# Altium PCB PCB.PcbDoc
Units mil, origin at the board's own origin, x right, y up, seen from the top; angles counter-clockwise.
Board outline 2900 x 2550 mil, 2 copper layers (Top Layer, Bottom Layer); 32 components, 34 nets, 152 pads, 0 vias.
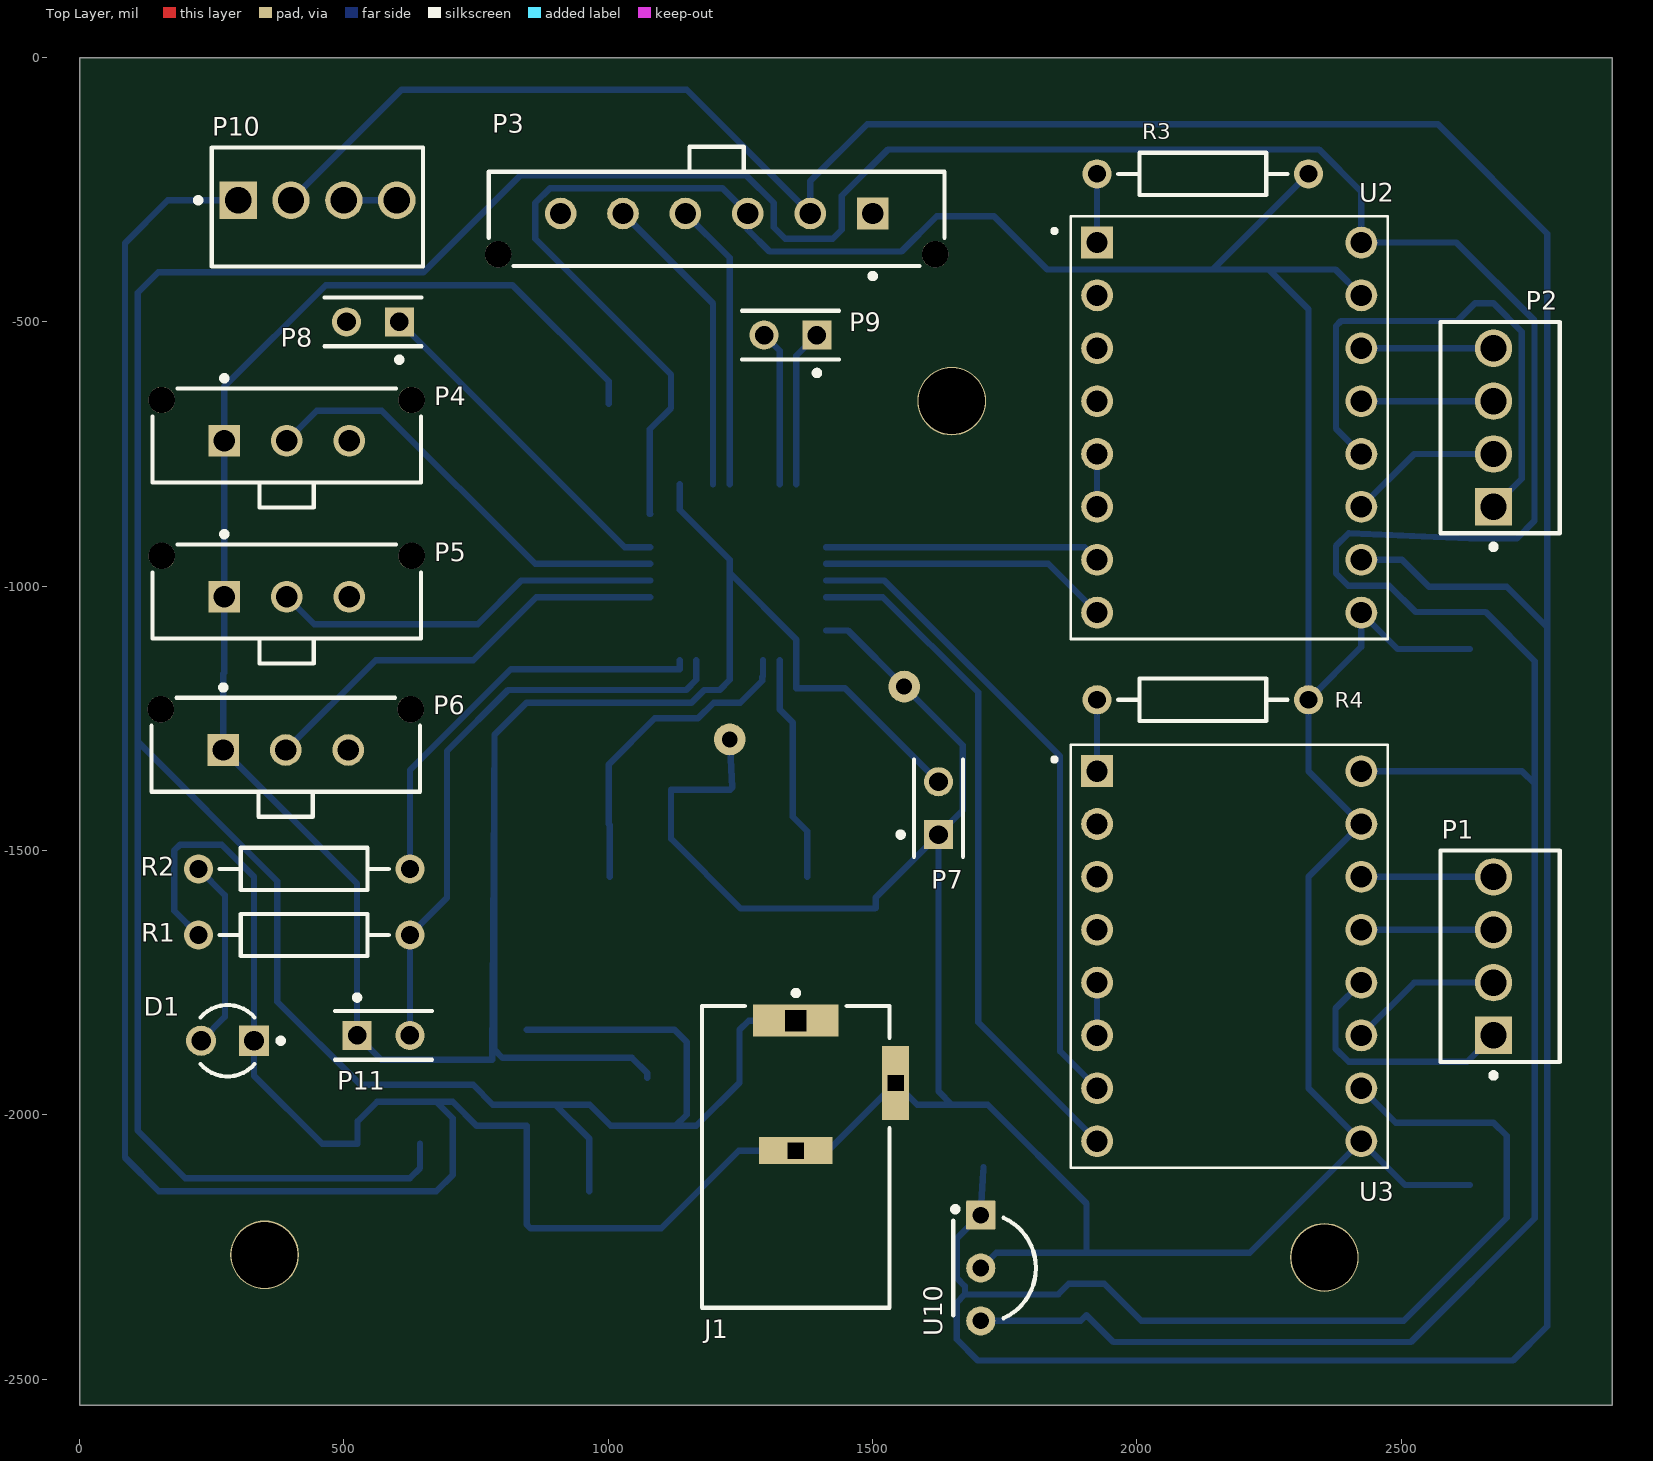
[diagram p0: Top Layer view]
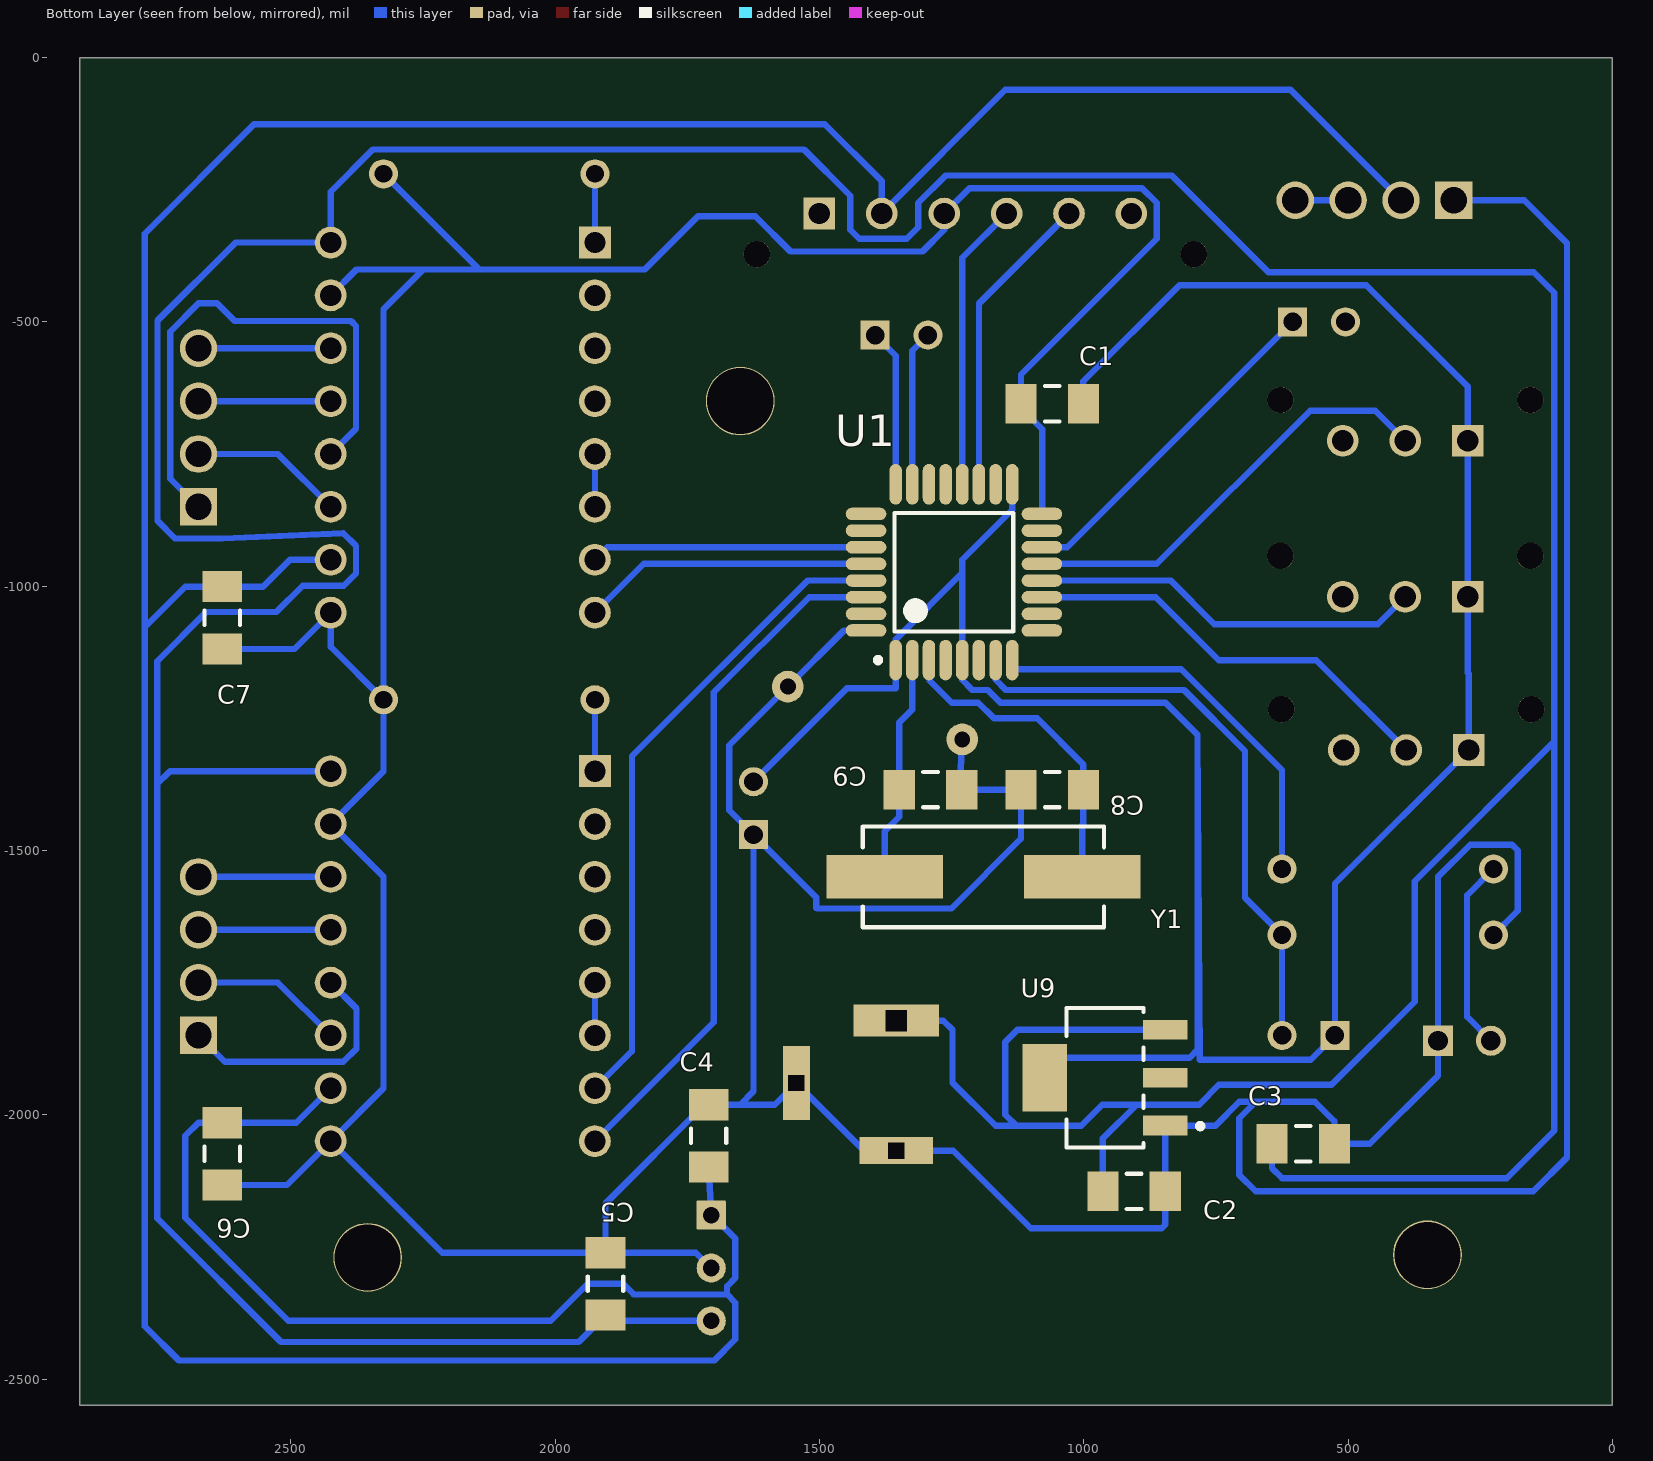
[diagram p1: Bottom Layer view, seen from below]
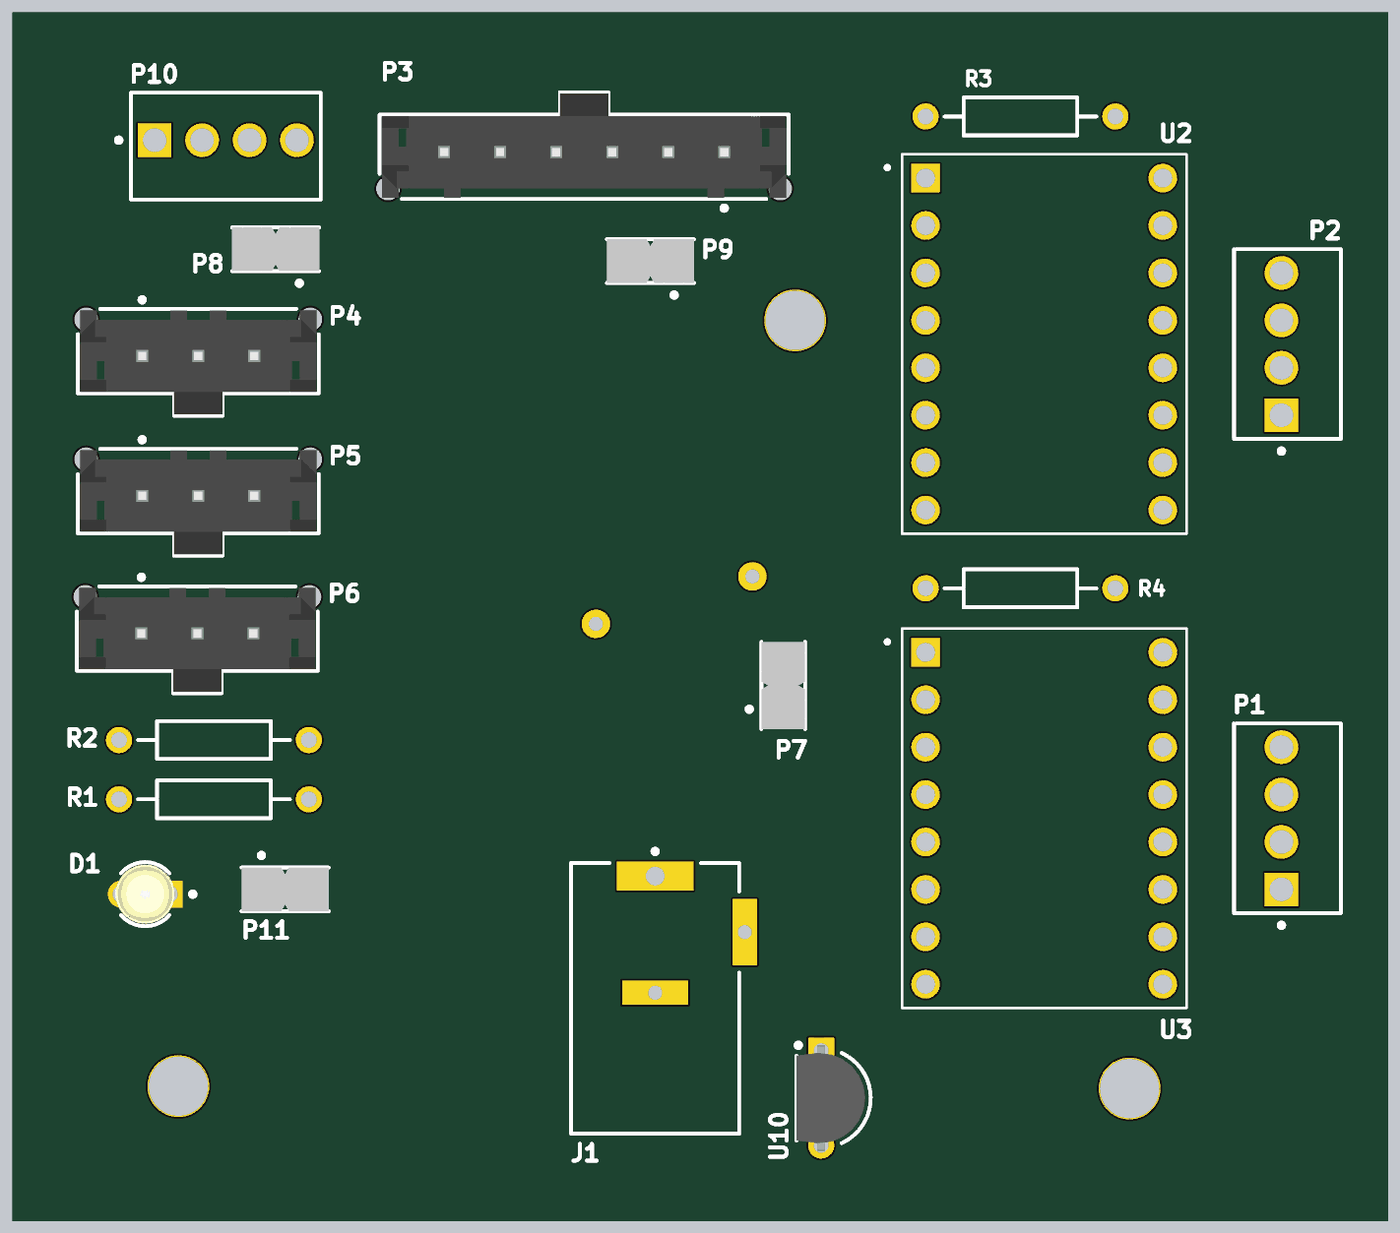
[diagram p2: 3D render of the assembled board from above, using the file's embedded part models]

## Layer stack, top to bottom
Top Solder: solder mask 0.4, Solder Resist, Dk 3.5
Top Layer: signal copper 1.4
Dielectric 1: dielectric 12.6, FR-4, Dk 4.8
Bottom Layer: signal copper 1.4
Bottom Solder: solder mask 0.4, Solder Resist, Dk 3.5

## Board outline
0,-2550 0,0 2900,0 2900,-2550

## Design rules (kind name [scope] priority, off if disabled: settings)
Clearance [All] p1: gap=12 ignorepadtopadclearanceinfootprint=FALSE
PolygonConnect [All] p1: connectstyle=Relief reliefconductorwidth=10 reliefentries=4 polygonreliefangle="90 Angle" airgapwidth=10
RoutingLayers [All] p1: top layer_v5=FALSE bottom layer_v5=TRUE
RoutingVias [All] p1: holewidth=28 width=50 viastyle="Through Hole" minholewidth=28 minwidth=50 maxholewidth=28 maxwidth=50
SolderMaskExpansion [All] p1: expansion=4 istentingtop=FALSE
Width [All] p1: maxlimit=12 minlimit=12 preferedwidth=12 minimp=50.000000 maximp=50.000000 favimp=50.000000
29 further rules are at their usual default settings.

## Components (designator, comment, footprint, x,y, rotation, side; value= is the part's Value field where it differs from the comment)
C1 "100nF" KEMT-1206-2_M 1060,-655 r180 bottom
C2 "100nF" KEMT-1206-2_M 905,-2145 r0 bottom
C3 "100nF" KEMT-1206-2_M 585,-2055 r0 bottom
C4 "100nF" KEMT-1206-2_M 1710,-2040 r90 bottom
C5 "330nF" KEMT-1206-2_M 1905,-2320 r270 bottom
C6 "100nF" KEMT-1206-2_M 2630,-2074.06 r270 bottom
C7 "100nF" KEMT-1206-2_M 2630,-1060 r270 bottom
C8 "10pF" KEMT-1206-2_M 1060,-1385 r0 bottom
C9 "10pF" KEMT-1206-2_M 1290,-1385 r180 bottom
D1 "HLMP-1719" FP-HLMP-1719-MFG 280,-1860 r180 top
J1 "RAPC712X" SWITCH-RAPC712X-3_V 1355,-1945 r0 top
P1 "NEMA17_X" TECO-640456-4 2675,-1700 r270 top
P2 "NEMA17_Y" TECO-640456-4 2675,-700 r270 top
P3 "HC_05" 66200611122 1205.27,-305.04 r0 top
P4 "SS_5GL" 66200311122 391.89,-714.96 r180 top
P5 "SS_5GL" 66200311122 391.89,-1009.96 r180 top
P6 "SS_5GL" 66200311122 390,-1300 r180 top
P7 "Powersupply programming" TECO-5-146280-2_V 1625,-1420 r90 top
P8 "Conecter to MG90S" TECO-5-146280-2_V 555,-500 r180 top
P9 "Programmer" TECO-5-146280-2_V 1345,-525 r180 top
P10 "MG90S" TECO-640456-4 450,-270 r180 top
P11 "Pushbutton" TECO-5-146280-2_V 575,-1850 r0 top
R1 "Res2" AXIAL-0.4 425,-1660 r180 top value=10K
R2 "Res2" AXIAL-0.4 425,-1535 r180 top value=330
R3 "Res2" AXIAL-0.4 2125,-220 r180 top value=330
R4 "Res2" AXIAL-0.4 2125,-1215 r180 top value=330
U1 "STM32F303K8T6" STM-LQFP32_M 1245.75,-973.66 r90 bottom
U2 "A4988_DRIVER_Y" MODULE_A4988_STEPPER_MOTOR_DRIVER_CARRIER 2175,-700 r0 top
U3 "A4988_DRIVER_X" MODULE_A4988_STEPPER_MOTOR_DRIVER_CARRIER 2175,-1700 r0 top
U9 "TLV1117-33IDCYR" FP-DCY0004A-MFG 960,-1930 r0 bottom
U10 "LM78L05ACZ" LP0003A 1705,-2290 r0 top
Y1 "ABLS2-8.000MHZ-D4Y-T" FP-ABLS2-MFG 1190,-1550 r0 bottom

## Footprints (in the part's own frame and the unit in brackets; to place one, negate y for a bottom-side part, rotate by r counter-clockwise, add the part's x,y. Pads: shape width x height; smd on the part's side, far side on the other; paste and mask are expansions set on the pad)
66200311122 [mm] "3.00mm Male Single Row Vertical Header, 3p"
  rect 1.52x1.52 hole 1.02: 1(3,0.255)
  round 1.52 hole 1.02: 2(0,0.255) 3(-3,0.255)
  round 1.27 hole 1.27 unplated: MH1(-6,-1.705) MH2(6,-1.705)
  silkscreen extent -6.45,-2.87 6.45,3.46, body extent -6.33,-2.19 6.32,3.38, height 9.93
66200611122 [mm] "3.00mm Male Single Row Vertical Header, 6p"
  rect 1.52x1.52 hole 1.02: 1(7.5,0.255)
  round 1.52 hole 1.02: 2(4.5,0.255) 3(1.5,0.255) 4(-1.5,0.255) 5(-4.5,0.255) 6(-7.5,0.255)
  round 1.27 hole 1.27 unplated: MH1(-10.5,-1.705) MH2(10.5,-1.705)
  silkscreen extent -10.95,-2.87 10.95,3.46, body extent -10.82,-2.19 10.83,3.38, height 9.93
AXIAL-0.4 [mm] "Axial Device, Thru-Hole; 2 Leads; 0.4 in Pin Spacing"
  round 1.4 hole 0.85: 1(-5.08,0) 2(5.08,0)
  silkscreen extent -4.06,-1.02 4.06,1.02
FP-ABLS2-MFG [mm]
  rect 5.6x2.1 smd paste+0 mask+0: 1(-4.75,0) 2(4.75,0)
  silkscreen extent -5.8,-2.42 5.8,2.42, body extent -6.35,-2.35 6.35,2.35, height 3.3
FP-DCY0004A-MFG [mm]
  rect 2.15x0.95 smd paste+0 mask+0: 1(-2.9,2.3) 2(-2.9,0) 3(-2.9,-2.3)
  rect 2.15x3.25 smd paste+0 mask+0: 4(2.9,0)
  silkscreen extent -4.7,-3.35 1.85,3.35, body extent -3.5,-3.25 3.5,3.25, height 1.8
FP-HLMP-1719-MFG [mm]
  rect 1.45x1.45 hole 0.95 paste-1000 mask+0: 1(-1.27,0)
  round 1.45 hole 0.95 paste-1000 mask+0: 2(1.27,0)
  silkscreen extent -2.68,-1.71 1.3,1.71, body extent -2.22,-2.22 2.22,2.22, height 0.25
KEMT-1206-2_M [mm] "SMD, 2-Leads, Body 3.4x1.8mm, IPC Low Density"
  rect 1.5x1.9 smd: 1(-1.5,0) 2(1.5,0)
  silkscreen extent -0.35,-0.85 0.35,0.85, body extent -1.7,-0.9 1.7,0.9, height 0.88
LP0003A [mm] "TO, Flat Index; 3 In-Line, Formed Axial Leads; Body Dia. 4.8mm; Leads 0.56 x 0.41 mm (max)"
  rrect7% 1.4x1.4 hole 0.8: 1(0,2.54)
  round 1.4 hole 0.8: 2(0,0) 3(0,-2.54)
  silkscreen extent -1.35,-2.41 2.65,2.95, body extent -1.33,-2.83 2.35,2.83, height 9.01
MODULE_A4988_STEPPER_MOTOR_DRIVER_CARRIER [mm]
  rect 1.53x1.53 hole 1.02: 1(-6.35,8.89)
  round 1.53 hole 1.02: 2(-6.35,6.35) 3(-6.35,3.81) 4(-6.35,1.27) 5(-6.35,-1.27) 6(-6.35,-3.81) 7(-6.35,-6.35) 8(-6.35,-8.89) 9(6.35,-8.89) 10(6.35,-6.35) 11(6.35,-3.81) 12(6.35,-1.27) 13(6.35,1.27) 14(6.35,3.81) 15(6.35,6.35) 16(6.35,8.89)
  silkscreen extent -8.5,-10.16 7.62,10.16
STM-LQFP32_M [mm] "QFP, 32-Leads, Body 7x7mm, Pitch 0.8mm, IPC Low Density"
  oval 1.95x0.6 smd: 1(-4.225,2.8) 2(-4.225,2) 3(-4.225,1.2) 4(-4.225,0.4) 5(-4.225,-0.4) 6(-4.225,-1.2) 7(-4.225,-2) 8(-4.225,-2.8) 17(4.225,-2.8) 18(4.225,-2) 19(4.225,-1.2) 20(4.225,-0.4) 21(4.225,0.4) 22(4.225,1.2) 23(4.225,2) 24(4.225,2.8)
  oval 0.6x1.95 smd: 9(-2.8,-4.225) 10(-2,-4.225) 11(-1.2,-4.225) 12(-0.4,-4.225) 13(0.4,-4.225) 14(1.2,-4.225) 15(2,-4.225) 16(2.8,-4.225) 25(2.8,4.225) 26(2,4.225) 27(1.2,4.225) 28(0.4,4.225) 29(-0.4,4.225) 30(-1.2,4.225) 31(-2,4.225) 32(-2.8,4.225)
  silkscreen extent -4.35,-2.85 2.85,3.78, body extent -3.5,-3.5 3.5,3.5, height 1.6
SWITCH-RAPC712X-3_V [mm] "CONN, 3-Leads, Body 14.5x9mm"
  rect 4.1x1.55 hole 1.01 square: 1(0,3.125)
  rect 3.55x1.3 hole 0.76 square: 2(0,-3.125)
  rect 1.3x3.55 hole 0.76 square: 3(4.8,0.125)
  silkscreen extent -4.5,-10.68 4.5,4.57, body extent -4.5,-10.68 4.5,3.83, height 11
TECO-5-146280-2_V [mm] "Connector, 2-Leads, Body 4.67x2.34mm, Pitch 2.54mm"
  rect 1.4x1.4 hole 0.89: 1(-1.27,0)
  round 1.4 hole 0.89: 2(1.27,0)
  silkscreen extent -2.34,-1.17 2.34,1.94, body extent -2.34,-1.17 2.34,1.17, height 5.33
TECO-640456-4 [mm] "Through Hole, 4-Leads, Body 10.16x5.72mm, Pitch 2.54mm"
  rect 1.8x1.8 hole 1.27 paste+0: 1(3.81,0)
  round 1.8 hole 1.27 paste+0: 2(1.27,0) 3(-1.27,0) 4(-3.81,0)
  silkscreen extent -5.08,-2.54 5.86,3.18, body extent -5.08,-2.54 5.08,3.18, height 10.03

## Part data
C1 C2 C3 C4 C5 C6 C7 C8 C9: library part CMP-1037-04202-2, "CAP, Ceramic, 0.1 uF, +/- 10%, 50 V, -55 to 125 degC, 1206 (3216 Metric), RoHS, Tape and Reel", Capacitance=0.1µF, Capacitance Tolerance=±10%, Capacitor Case Style=1206[3216Metric], Dielectric Characteristic=X7R, Manufacturer=Kemet, Operating Temperature Max=125degC, Operating Temperature Min=-55degC, Package Description="2-Leads SMD, Body 3.2 x 1.6 mm", Package Reference=1206-2, Voltage Rating=50V, Datasheet URL=https://datasheet.ciiva.com/6125/1725438-6125494.pdf, Datasheet Version=Jul-13, Manufacturer URL=http://www.kemet.com/, Packaging=Tape&Reel, Product Range=KEMET-CSeries, SVHC=ToBeAdvised
D1: library part CMP-2000-06410-2, "LED YELLOW DIFFUSED T-1 T/H", Colour=Yellow, Forward Current=2mA, Forward Voltage=1.8V, Manufacturer=Broadcom, Package=0, Power Dissipation=17.5mW, Reverse Voltage=5V, Temperature="-40°C to +100°C", Temperature Range High=+100°C, Temperature Range Low=-40°C, Automotive=No, Category=Diode, ComponentLink2Description=Datasheet, ComponentLink2URL=https://docs.broadcom.com/docs/AV02-1557EN, Device Class L1=Optoelectronics, Device Class L2=LEDs, Device Class L3=unset, Digikey Description="LED YELLOW DIFFUSED T-1 T/H", Lead Free=Yes, Led Orientation=Straight, Luminous Intensity=2.1mcd, Manufacturer Part Number=HLMP-1719, Mouser Description="Standard LEDs - Through Hole Yellow Diffused 585nm 2.1mcd", Octopart=https://octopart.com/hlmp-1719-broadcom-71130405, RoHS=TRUE, Viewing Angle=50°, Wavelength=585nm
J1: library part CMP-2000-05383-1, "Conn Powerjack Mini R/A PCMT, 5 A, 3-Pin THD, RoHS", Color=Black, Current Rating=5A, Manufacturer=Switchcraft, Standard Package=2,500, Catalog Drawings="RAPC7(1,2)2XSide /  / RAPC7(1,2)2XTop", Category=Connectors,Interconnects, Connector Type=Jack, Contact Material=Brass, Contact Material - Plating=Nickel, Datasheet URL=https://datasheet.ciiva.com/391/rapc712x-cd-391666.pdf, Datasheet Version="Rev. A, 08/2005", Dynamic Catalog=SwitchcraftInc, Family=Barrel-PowerConnectors, Gender=Male, Housing Color=Black, Housing Material=Thermoplastic, Internal Switch(s)=SingleSwitch,NormallyClosed, Manufacturer URL=http://www.switchcraft.com/, Mating Products="SC1539-ND / -CONNPLUGMINIPWR2CONDBLK/RED / SC1051-ND / -CONNPLUGMINIPOWER2CONDBLACK", Mounting Type=ThroughHole,RightAngle, Number of Positions/Contacts=2Conductors,2Contacts, Other Names="Q2387461 / Q2526383 / RAPC712X-ND / SC237", Plug/Mating Plug Diameter=2.5mmID,5.5mmOD, RoHS Information=SwitchcraftRoHSInfo, Shielding=Unshielded, Termination=SolderEyelet(s)
P1 P2 P10: library part CMP-2000-05419-1, "Male Header, Pitch 2.54 mm, 1 x 4 Position, Height 10.03 mm, Tail Length 3.56 mm, RoHS, Bulk", Color=White, Current, Rating="5 /  / A", Flammability Rating=UL94V-0, Manufacturer="TE Connectivity", Temperature, Operating="-55to+105 /  / degC", Voltage, Rating="250 /  / V", Agency Approvals=CSA,UL, Angle=Straight, Brand/Series=MTA-100Series, Color, Housing=White, Connector Type=MTA-100, Contact Centerline Spacing="0.100 /  / in.", Contact Mating Area Plating=Tin, Contact Plating=Tin, Contact Shape=Square, Contact Termination Area Plating=Tin, Datasheet URL=https://datasheet.ciiva.com/16286/eng-ds-82056-mta-0608-16286228.pdf, Datasheet Version=Dec-14, Length, Overall="0.4 /  / \"", Length, Pin="0.14 /  / \"", Length, Terminal Post="0.14 /  / in.", Manufacturer URL=http://www.te.com/, Material, Contact=CopperAlloy, Material, Housing=Polyester, Mount Angle=Vertical, Mounting Hole Size="0.04 /  / \"", Mounting Type=PCMount, Number of Contacts=4, Number of Positions=4, Number of Rows=1, Pin Spacing="0.1 /  / \"", Primary Type=InterconnectSystem, Size, Post="0.025 /  / in.", Special Features=Pinstrip, Standards=RoHSCompliant,ELVCompliant,UL94V-0, Termination=Solder, Type=PCBPlug
P3: library part CMP-1502-00444-1, "THT Male Header WR-MPC3, Vertical, Single Row, pitch 3 mm, 6 pins", Contact Resistance=10mOhm, Manufacturer="Wurth Elektronik", Operating Temperature=-40to105degC, Package Reference=66200611122, Working Voltage=250VAC, Datasheet URL=https://katalog.we-online.de/em/datasheet/6620xx11122.pdf, Gender=Male, Manufacturer URL=http://www.we-online.de, Mounting Technology=THT, Orientation=Vertical, Packaging=Tube, Part Number=66200611122, Pin Number=6, Pitch=3mm, Publisher=WurthElektronik
P4 P5 P6: library part CMP-1502-00441-1, "THT Male Header WR-MPC3, Vertical, Single Row, pitch 3 mm, 3 pins", Contact Resistance=10mOhm, Manufacturer="Wurth Elektronik", Operating Temperature=-40to105degC, Package Reference=66200311122, Working Voltage=250VAC, Datasheet URL=https://katalog.we-online.de/em/datasheet/6620xx11122.pdf, Gender=Male, Manufacturer URL=http://www.we-online.de, Mounting Technology=THT, Orientation=Vertical, Packaging=Tube, Part Number=66200311122, Pin Number=3, Pitch=3mm, Publisher=WurthElektronik
P7 P8 P9 P11: library part CMP-2000-07492-1, "Male Header, Pitch 2.54 mm, 1 x 2 Position, Height 8.21 mm, Tail Length 3.05 mm, -65 to 105 degC, RoHS, Bulk", Case\/Package=100, Colour=Black, Current Rating=3A, Flammability Rating=UL94V-0, High Temperature Housing=Yes, Manufacturer="TE Connectivity", Max Current Rating=5A, Max Operating Temperature=105degC, Min Operating Temperature=-65degC, Package Description="Male Header, Pitch 2.54 mm, 1 x 2 Position, Height 8.21 mm, Tail Length 3.05 mm", Package Quantity=500, Package Reference=5-146280-2, Approvals=CSA, Board Standoff=No(Without), Connector Type=Header, Contact Gender=Male, Contact Material=CopperAlloy, Contact Mating Length=0.23inch, Contact Plating=Matte, Contact Protection=No(Without), Contact Shape=Square, Datasheet URL=http://www.te.com/commerce/DocumentDelivery/DDEController?Action=showdoc&DocId=Customer+Drawing%7F146280%7FH1%7Fpdf%7FEnglish%7FENG_CD_146280_H1.pdf%7F5-146280-2, Datasheet Version="Rev. H1, 08/2016", Depth=2.34mm, Gasket=No(Without), High Speed Serial Data Connector=No, Housing Colour=Black, Housing Material=Polymer, Keyed=No, Length=4.67mm, Manufacturer URL=http://www.te.com/, Mating Alignment=No(Without), Mating Connector Lock=No(Without), Mating Post Length=0.23inch, Mount=ThroughHole, Mounting Technology=ThroughHole, Number of Contacts=2, Number of Positions=2, Number of Rows=1, Orientation=Straight, Packaging=Carton, Panel Mount Retention=No(Without), PCB Mount Retention=Without, PCB Mounting Orientation=Vertical, PCB Thickness=0.063inch, Pitch=2.54mm, Radiation Hardening=No, RoHSCompliant=true, Row Spacing=2.54mm, Selectively Loaded=No(Without), Stabilizers=No(Without), Termination=ThroughHole, Termination Post Length=0.12inch
R1 R2 R3 R4: "Resistor", LatestRevisionDate=17-Jul-2002, LatestRevisionNote="Re-released for DXP Platform.", PackageDescription="Axial Device, Thru-Hole; 2 Leads; 0.4 in Pin Spacing", PackageReference=AXIAL-0.4, Published=8-Jun-2000, Publisher="Altium Limited"
U1: library part CMP-0537-00040-1, "ARM Cortex-M4 32-bit MCU, 64 KB Flash, 16 KB Internal RAM, 25 I/Os, 32-Pin LQFP, -40 to 85 degC, Tray", I/Os (High Current)=25, Operating Frequency(F) (Processor speed) (MHz)=72, Package Description="32-Pin Low Profile Quad Flat Package, 7 x 7 mm Body, 0.8 mm Pitch", Package Reference=LQFP32, Supply Voltage(Vcc) min (V)=2, ComponentLink1Description="Manufacturer URL", ComponentLink1URL=http://www.st.com/, ComponentLink2Description=Datasheet, ComponentLink2URL=http://www.st.com/st-web-ui/static/active/en/resource/technical/document/datasheet/DM00092070.pdf, Core="ARM Cortex-M4", D/A Converter=3, DatasheetVersion="Rev. 4", FLASH Size (Prog) (kB)=64, Internal RAM Size (kB)=16, Mounting Technology="Surface Mount", Packing=Tray
U2 U3: library part A4988_STEPPER_MOTOR_DRIVER_CARRIER, "Stepper Motor Driver", Package=None, Availability=Unavailable, MF=Pololu, MP="A4988 STEPPER MOTOR DRIVER CARRIER", Price=None, SnapEDA_Link=https://www.snapeda.com/parts/A4988%20STEPPER%20MOTOR%20DRIVER%20CARRIER/Pololu/view-part/1499394/?ref=snap
U9: library part CMP-04917-000056-1, "IC REG LIN 3.3V 800MA SOT223-4", Dropout Voltage=1.2V, Manufacturer="Texas Instruments", Max Junction Temp=+125°C, Max Supply Voltage=15V, Min Supply Voltage=4.7V, Nominal Supply Current=5mA, Output Current=0.8A, Output Voltage=3.3V, Package=DCY0004A, Temperature="-40°C to +125°C", Temperature Range Low=-40°C, Automotive=No, Category=IC, ComponentLink2Description=Datasheet, ComponentLink2URL=http://www.ti.com/lit/ds/symlink/tlv1117.pdf, Device Class L1="Integrated Circuits (ICs)", Device Class L2="Power Management ICs", Device Class L3="Voltage Regulators - Linear", Digikey Description="IC REG LIN 3.3V 800MA SOT223-4", Height=1.8mm, Lead Free=Yes, Manufacturer Part Number=TLV1117-33IDCYR, Mouser Description="LDO Voltage Regulators Fixed LDO Volt Reg", Number Of Outputs=1, Octopart=https://octopart.com/tlv1117-33idcyr-texas+instruments-669250, Output Type=Fixed, RoHS=TRUE, Standoff Height=0.02mm, Temperature Range High=+125°C
U10: library part CMP-0062-00040-4, "3-Terminal Positive Regulator, 5 Vout, 3-pin TO-92, Pb-Free", Manufacturer="Texas Instruments", PackageTopMarking=NSXYTT*LM78L*05ACZ, PartNumber=LM78L05ACZ/NOPB, PowerWise=N, Code_JEDEC=TO-226-AA, ComponentLink1Description="Datasheet URL", ComponentLink1URL=http://www.ti.com/general/docs/lit/getliterature.tsp?genericPartNumber=LM78L05&fileType=pdf, CompType="LDO IC", High-Reliability=Y, PackageDescription="TO-92, Molded, 3 Lead", PackageReference=LP0003A, PinCount=3, RoHS=Y
Y1: library part CMP-27762-001729-1, "CRYSTAL 8.0000MHZ 18PF SMD", ESR (Equivalent Series Resistance)=80R, Frequency=8MHz, Frequency Stability=30ppm, Load Capacitance=18pF, Max Operating Temperature=85°C, Min Operating Temperature=-40°C, Operating Frequency="8 MHz", Package Quantity=1000, Depth=4.7mm, Frequency Tolerance=30ppm, Height=0.13inch, Lead Free="Lead Free", Length=11.4mm, Mount="Surface Mount", Number of Pins=2, Packaging="Tape and Reel", RoHS Compliant=Yes, Series=ABLS2, Series Resistance=80R, Termination=SMD/SMT, Tolerance=30ppm, Width=4.7mm

## Free pads (board coordinates)
  round 60 hole 30: 2(1230,-1290) 3(1560,-1190)
  round 130 hole 125: ""(350,-2265) ""(1650,-650) ""(2355,-2270)

## Nets (pads, with @x,y where several pads share a name; then routed paths per layer and width w, separated by ;. In a path a pad name is that pad's centre, name@x,y a point inside that pad or via, vN(x,y) a via of type N, cw(c..) or ccw(c..) an arc to the next point about the centre after c; other vN are vias at no path point)
3.3V: C1.2 P4.1 P5.1 P6.1 P7.2 P11.1 U1.1 U1.5 U1.17 U9.4 | length 5569.9
  Bottom Layer w12: C1.2 1000.94,-612.38 819,-430.44 465.56,-430.44 273.78,-622.22 P4.1 P5.1 273.78,-1164.11 271.89,-1166 P6.1 525,-1563.15 P11.1 571,-1896 781,-1896 785,-1281 ; U9.4 1074.17,-1921.17 1045,-1892 800,-1892 785,-1877 785,-1281 ; U1.17 1135.51,-855.51 1230,-950 1230,-975 ; P7.2 1448,-1193 1355.98,-1193 U1.1 1355.98,-1100.98 1230,-975 ; 785,-1281 845.61,-1220.39 1157.8,-1220.39 1181.8,-1196.39 1210.85,-1196.39 1230,-1177.24 U1.5 1230,-975
5V: C4.1 C6.1 C7.1 P3.2 P10.2 U2.10 U3.10 U10.1 | length 8354.7
  Bottom Layer w12: P10.2 609,-61 1148.44,-61 P3.2 1382.44,-233.56 1490,-126 2570,-126 2777,-333 2777,-1077.94 ; U10.1@1704.56,-2190.44 1705.89,-2168.44 1705.89,-2168.09 1708.58,-2122.94 1708.58,-2122.58 C4.1 ; U10.1 1683.44,-2211.56 1682.03,-2211.56 1659.44,-2234.15 1659.44,-2308.87 1675,-2324.43 1675,-2340 ; U3.10 2490,-2015 C6.1 2675,-2015 2700,-2040 2700,-2195 2505,-2390 2008.33,-2390 1938.33,-2320 1871.67,-2320 1851.67,-2340 1675,-2340 ; U2.10 2502,-950 2552.94,-1000.94 C7.1 2700,-1000.94 2777,-1077.94 ; 1675,-2340 1659.44,-2355.56 1659.44,-2425 1699.44,-2465 2712,-2465 2777,-2400 2777,-1077.94
12V: C2.2 C3.2 C5.2 J1.1 U2.16 U3.16 U9.3 U10.3 | length 11647.6
  Bottom Layer w12: C3.2 644.06,-2100.94 625,-2120 200,-2120 110,-2030 110,-1294 ; U9.3 1125.5,-1839.45 1148.55,-1862.5 1148.55,-2000 1127.55,-2021 ; C2.2 964.06,-2045.06 900,-1981 ; J1.1 1266.03,-1821.97 1248.55,-1839.45 1248.55,-1939.45 1167,-2021 1127.55,-2021 ; U10.3 1894.06,-2390 C5.2 1955.94,-2430 2519,-2430 2753,-2196 2753,-1374 ; U3.16 2729,-1350 2753,-1374 ; 110,-1294 374,-1558 374,-1786 531.56,-1943.56 744.56,-1943.56 782,-1981 900,-1981 ; 110,-1294 110,-445 148.56,-406.44 650.56,-406.44 833.92,-223.08 1261.08,-223.08 1313,-275 1313,-320.92 1335,-342.92 1425,-342.92 1442,-325.92 1442,-261.5 1529.5,-174 2345,-174 2425,-254 U2.16 2605,-350 2752.43,-497.43 2752.43,-876.57 2719,-910 2630,-910 2401,-900 2376.88,-924.12 2376.88,-975.88 2400,-999 2478,-999 2528,-1049 2660,-1049 2753,-1142 2753,-1374 ; 900,-1981 965,-1981 1005,-2021 1127.55,-2021
GND: C1.1 C2.1 C3.1 C4.2 C5.1 C6.2 C7.2 C8.2 C9.2 D1.1 J1.2 J1.3 P3.3 P7.1 P10.1 pad.2 pad.3 R1.2 R3.1 R4.1 U1.16 U1.32 U2.9 U2.15 U3.9 U3.15 U9.1 U10.2 | length 13713.6
  Bottom Layer w12: R1.2 179,-1614 179,-1500 190,-1489 269,-1489 330,-1550 D1.1 330,-1926 459,-2055 C3.1 525.94,-2012.5 562.85,-1975.6 675,-1975.6 ; P10.1 167,-270 86,-351 86,-2081 150,-2145 675,-2145 706.05,-2113.95 706.05,-2006.64 675,-1975.6 ; U1.16 1079,-863.43 1079,-703.05 1119.05,-663 C1.1 1119.05,-600 862,-342.95 862,-275 889.92,-247.08 1216.41,-247.08 P3.3 1264.33,-326 1305.25,-366.92 1555.08,-366.92 1622,-300 1730,-300 1831,-401 2144,-401 ; pad.2 1235,-1380.94 C9.2 C8.2 1119.06,-1478.06 1251,-1610 1505,-1610 1506,-1609 1506,-1589 P7.1 ; U1.32 1453.9,-1083.9 pad.3 1671,-1301 1671,-1424 P7.1 ; U10.2 1734.06,-2260.94 C5.1 ; R3.1 2144,-401 ; U2.15 2376,-401 2250,-401 ; C6.2 2508.11,-2133.11 U3.9 ; C7.2 2494.06,-1119.06 U2.9 2425,-1115 R4.1 ; 675,-1975.6 706.05,-1975.6 751,-2020.55 U9.1 845.83,-2082.88 845.95,-2083 C2.1 845.95,-2207.78 852.98,-2214.81 1100.22,-2214.81 1247,-2068.03 J1.2 1416.02,-2068.03 J1.3 1584.84,-1980.95 1650,-1980.95 ; P7.1 1625,-1955.95 1650,-1980.95 ; 1650,-1980.95 C4.2 1717.87,-1980.95 1905,-2168.07 C5.1 ; C5.1 2214.06,-2260.94 U3.9 ; 2144,-401 2250,-401 ; 2250,-401 2325,-476 R4.1 ; R4.1 2325,-1350 U3.15 2325,-1550 2325,-1950 U3.9
NetC8_1: C8.1 U1.3 Y1.1 | length 609
  Bottom Layer w12: Y1.1 1002.99,-1452 1000.94,-1449.95 C8.1 1000.94,-1337.5 1088.44,-1250 1170,-1250 1199.61,-1220.39 1249.84,-1220.39 1291.31,-1178.92 1291.31,-1171.94 1292.99,-1170.26 U1.3
NetC9_1: C9.1 U1.2 Y1.2 | length 431.8
  Bottom Layer w12: U1.2 1324.49,-1233.43 1349.06,-1258 C9.1 1349.06,-1436.05 1377.01,-1464 Y1.2
NetD1_2: D1.2 R2.2 | length 364.4
  Bottom Layer w12: R2.2 275,-1585 275,-1815 D1.2
NetP1_1: P1.1 U3.12 | length 475.4
  Bottom Layer w12: U3.12 2376,-1799 2376,-1875 2401,-1900 2625,-1900 P1.1
NetP1_2: P1.2 U3.11 | length 291.4
  Bottom Layer w12: U3.11 2525,-1750 P1.2
NetP1_3: P1.3 U3.13 | length 250
  Bottom Layer w12: U3.13 P1.3
NetP1_4: P1.4 U3.14 | length 250
  Bottom Layer w12: U3.14 P1.4
NetP2_1: P2.1 U2.12 | length 1007.1
  Bottom Layer w12: U2.12 2376.88,-701.88 2376.88,-508.12 2386.57,-498.43 2606.57,-498.43 2640,-465 2675,-465 2728.43,-518.43 2728.43,-796.57 P2.1
NetP2_2: P2.2 U2.11 | length 291.4
  Bottom Layer w12: U2.11 2525,-750 P2.2
NetP2_3: P2.3 U2.13 | length 250
  Bottom Layer w12: U2.13 P2.3
NetP2_4: P2.4 U2.14 | length 250
  Bottom Layer w12: U2.14 P2.4
NetP3_4: P3.4 U1.20 | length 547
  Bottom Layer w12: P3.4 1230,-378.78 U1.20
NetP3_5: P3.5 U1.19 | length 582.9
  Bottom Layer w12: P3.5 1198.5,-465.39 U1.19
NetP4_2: P4.2 U1.13 | length 831.2
  Bottom Layer w12: P4.2 448.89,-668 572,-668 861.91,-957.91 U1.13
NetP5_2: P5.2 U1.12 | length 743.3
  Bottom Layer w12: P5.2 443.89,-1072 753,-1072 835.59,-989.41 U1.12
NetP6_2: P6.2 U1.11 | length 809.2
  Bottom Layer w12: P6.2 560.04,-1140 745,-1140 864.09,-1020.91 U1.11
NetP8_1: P8.1 U1.14 | length 651
  Bottom Layer w12: P8.1 1031.42,-926.42 U1.14
NetP9_1: P9.1 U1.24 | length 298.5
  Bottom Layer w12: U1.24 1355.98,-564.02 P9.1
NetP9_2: P9.2 U1.23 | length 294.5
  Bottom Layer w12: P9.2 1324.49,-554.49 U1.23
NetP10_3: P10.3 P10.4 | length 100
  Bottom Layer w12: P10.3 P10.4
NetP11_2: P11.2 R1.1 U1.7 | length 1132
  Bottom Layer w12: P11.2 R1.1 695,-1590 695,-1312.03 810.64,-1196.39 1147.86,-1196.39 1167.01,-1177.24 U1.7
NetR2_1: R2.1 U1.8 | length 793.6
  Bottom Layer w12: R2.1 625,-1348.09 816.09,-1157 1135.51,-1157 U1.8
NetR3_2: R3.2 U2.1 | length 130
  Bottom Layer w12: U2.1 R3.2
NetR4_2: R4.2 U3.1 | length 135
  Bottom Layer w12: U3.1 R4.2
NetU1_27: U1.27 U2.7 | length 522.7
  Bottom Layer w12: U1.27 1901.42,-926.42 U2.7
NetU1_28: U1.28 U2.8 | length 551.1
  Bottom Layer w12: U1.28 1832.91,-957.91 U2.8
NetU1_29: U1.29 U3.7 | length 1237.6
  Bottom Layer w12: U1.29 1522.29,-989.41 1855,-1322.12 1855,-1880 U3.7
NetU1_30: U1.30 U3.8 | length 1304.7
  Bottom Layer w12: U1.30 1519.85,-1020.91 1700,-1201.06 1700,-1825 U3.8
NetU2_5: U2.5 U2.6 | length 100
  Bottom Layer w12: U2.6 U2.5
NetU3_5: U3.5 U3.6 | length 100
  Bottom Layer w12: U3.6 U3.5
pads on no net: P3.1 P3.6 P3.MH1 P3.MH2 P4.3 P4.MH1 P4.MH2 P5.3 P5.MH1 P5.MH2 P6.3 P6.MH1 P6.MH2 P8.2 U1.4 U1.6 U1.9 U1.10 U1.15 U1.18 U1.21 U1.22 U1.25 U1.26 U1.31 U2.2 U2.3 U2.4 U3.2 U3.3 U3.4 U9.2

## Silkscreen, mask and mechanical layers (free items; w line width, h text height)
Mechanical 1:
  the board outline again, w10